# EAGLE board PROIECT_OPEN_READER v89 (EAGLE 9.7.0)
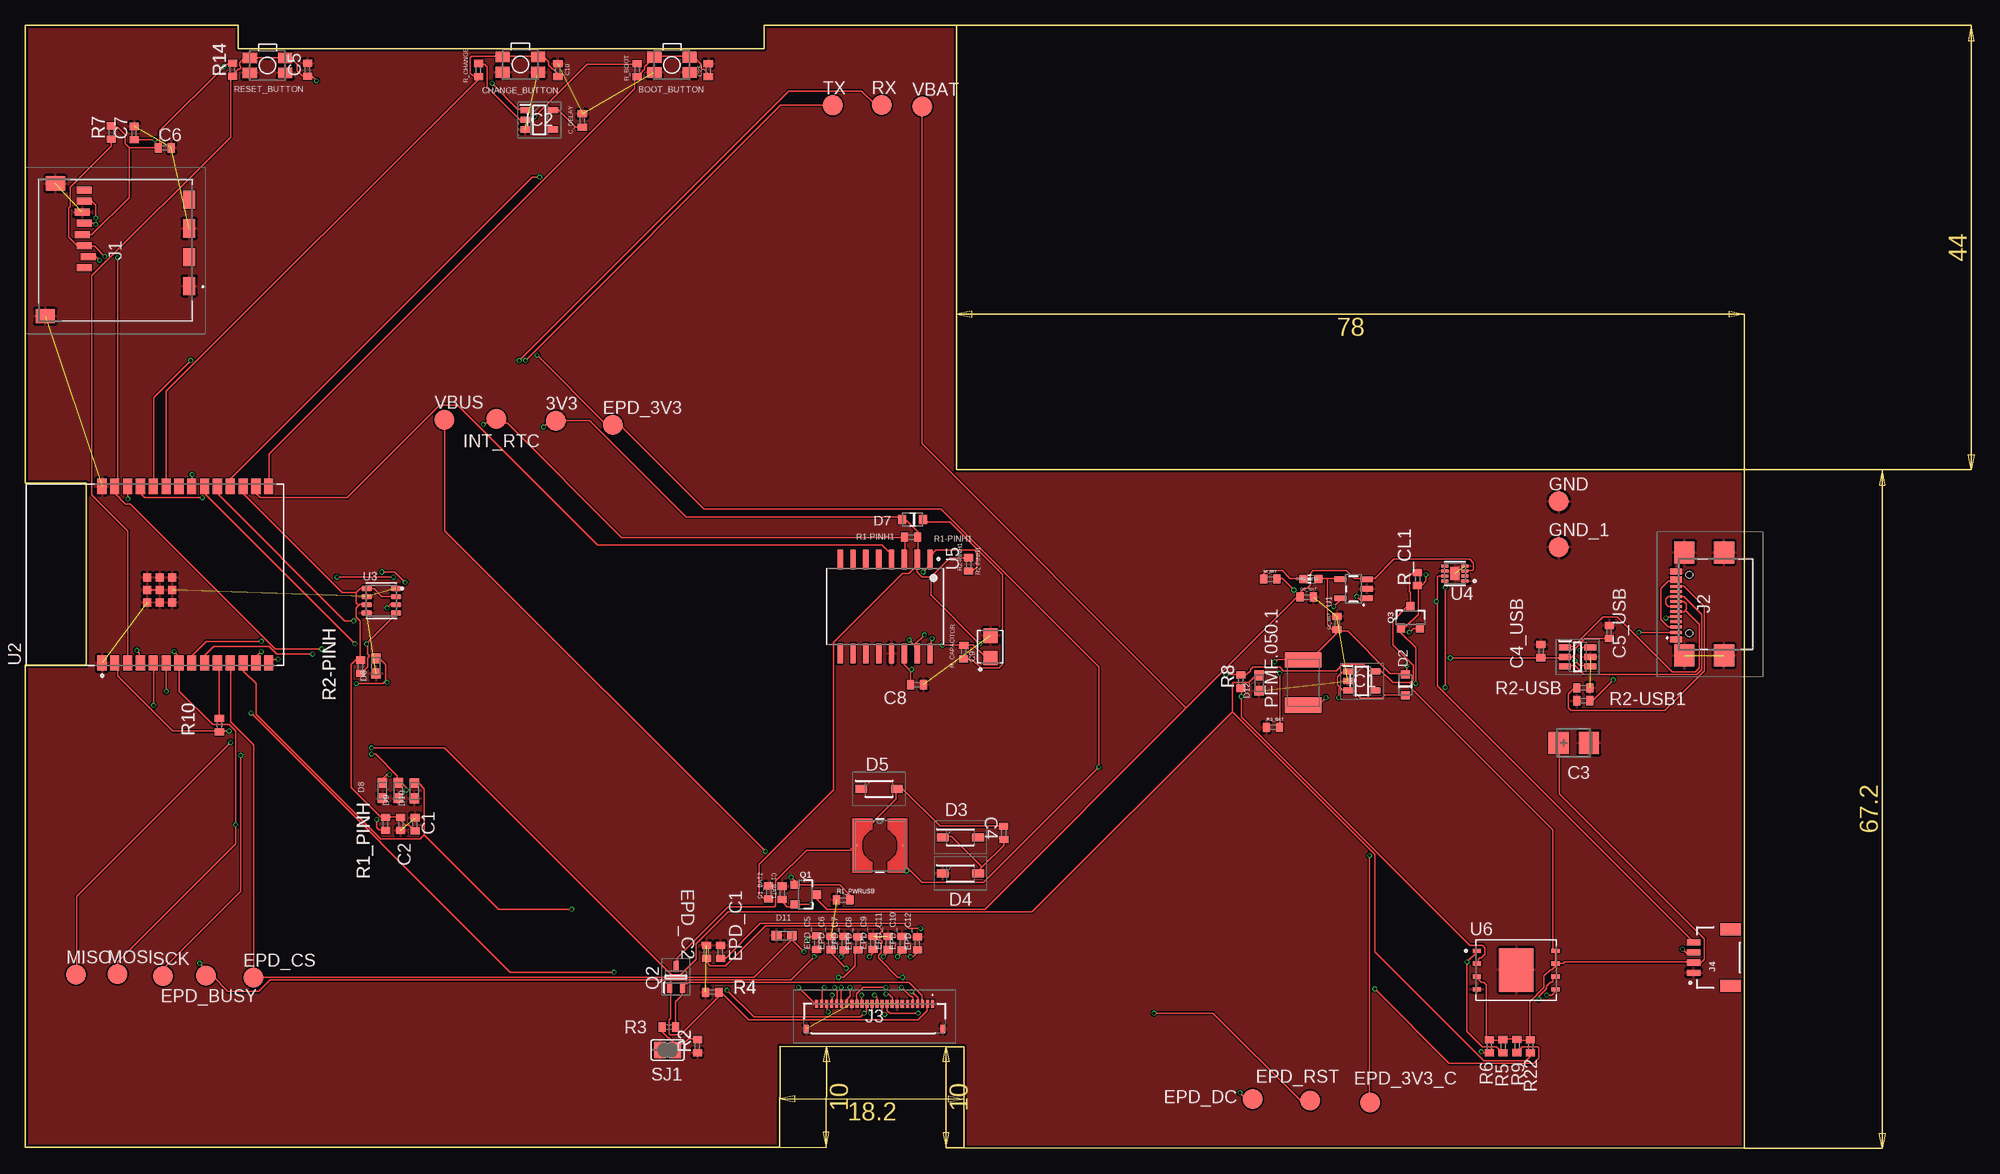
[diagram p0: board, top side]
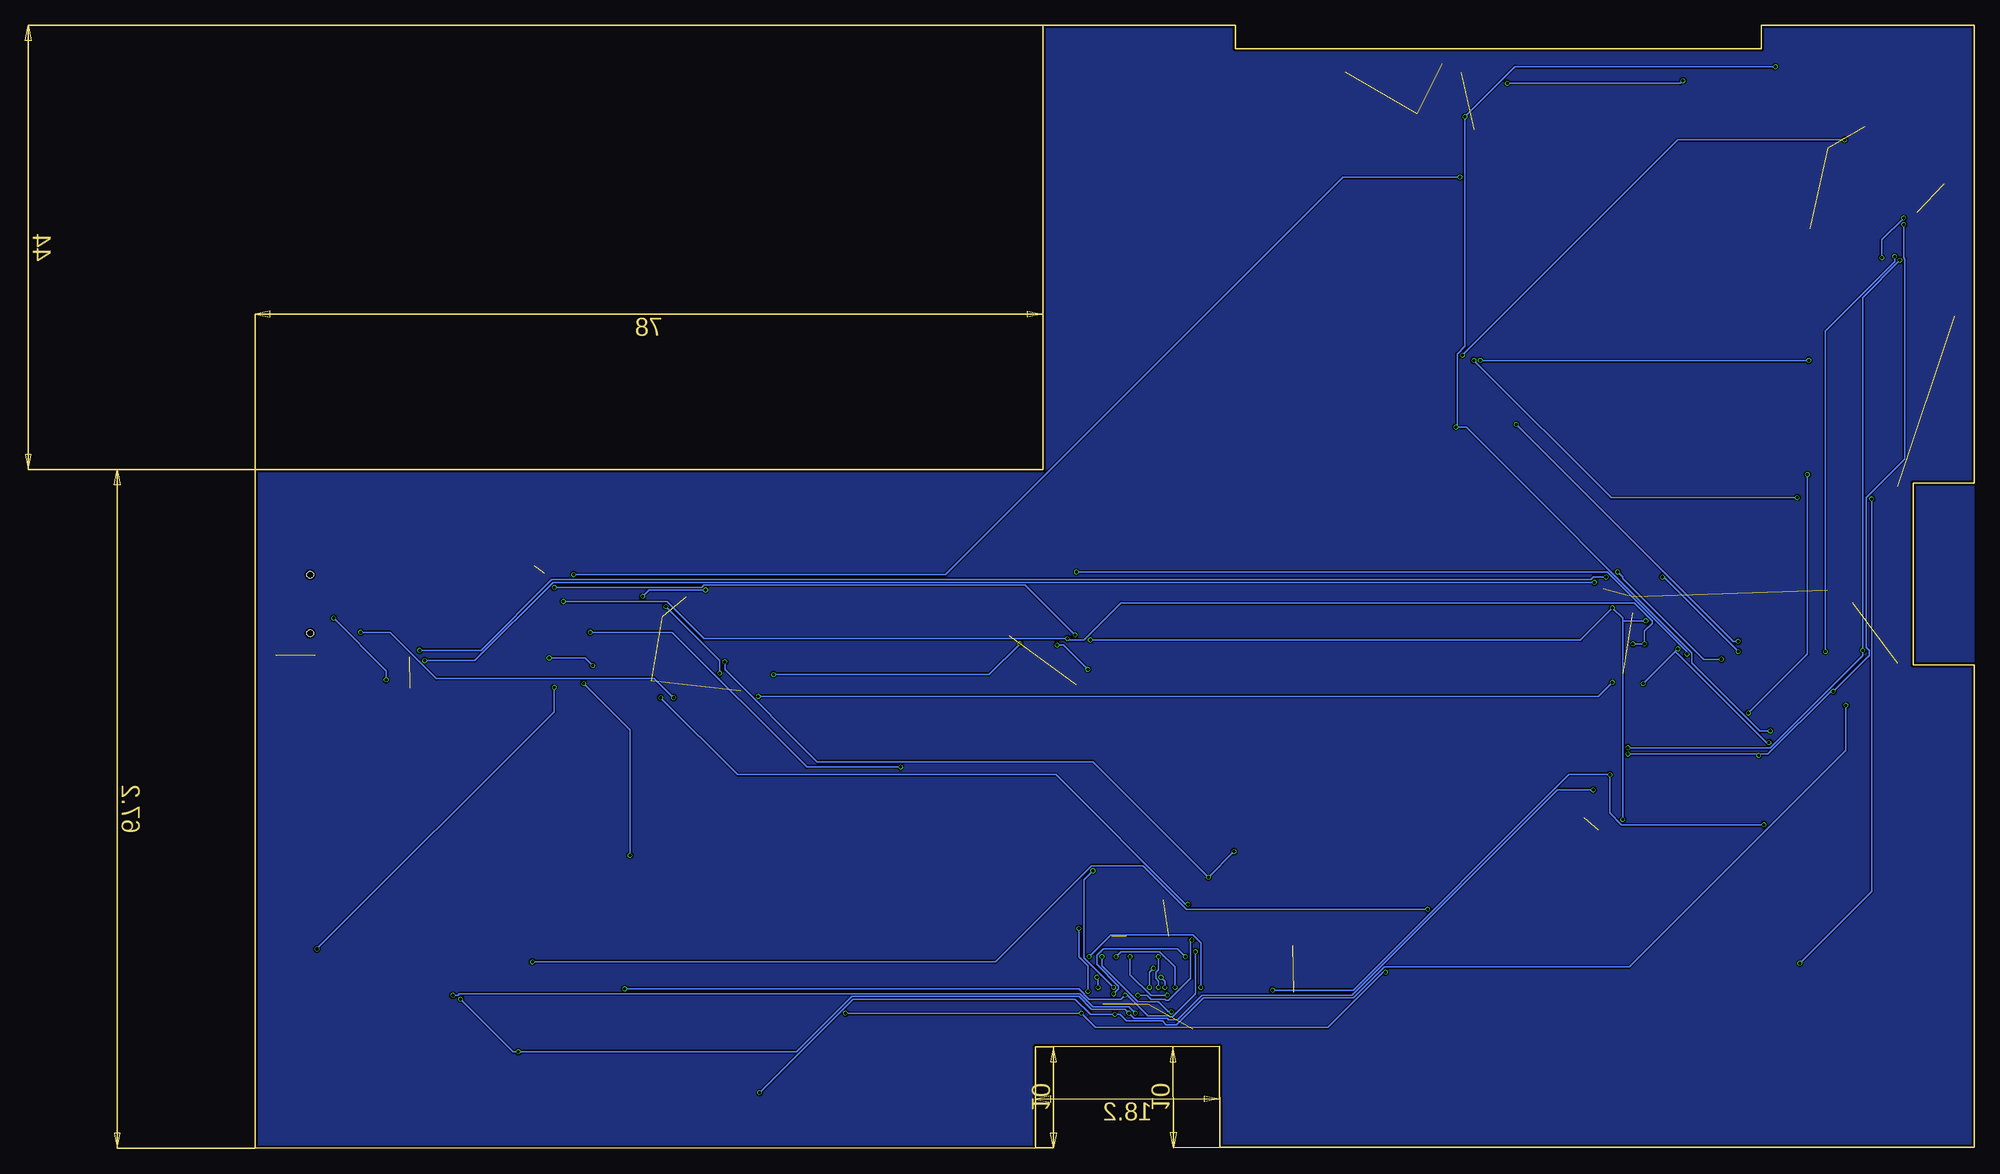
[diagram p1: board, bottom side, seen from below]

Size 170.22 x 111.22 mm. Coordinates in mm from the lower left corner, seen from the top.
Outline: 92.94,10.06 74.73,10.1 74.69,0.1 0.01,0.1 0.01,47.89 6.05,47.89 6.05,65.91 0,65.91 0,111.22 21.06,111.22 21.06,108.88 73.16,108.88 73.16,111.2 92.22,111.2 92.22,67.2 170.22,67.2 170.22,0 92.94,0.06 92.94,10.06
Copper layers (1*16): Top 0.035mm / dielectric 1.6mm / Bottom 0.035mm
Design rules "jlcpcb-2layers.dru": minimum track width 5mil, minimum drill 0.3mm, track to track 5mil, track to pad 5mil, pad to pad 5mil, via to via 5mil, smd to smd 5mil, copper to edge 0.2mm, drill to drill 6mil, minimum pad ring 10mil, minimum via ring 3mil, stop-mask expansion 4mil, vias tented up to drill 0mil, thermal gap 10mil

## Footprints (pad centres in the part's own frame; a part is rotated, then mirrored left to right if it is on the bottom)
TP20R = smd 2 x 2: TP 0,0
MYBUTTON = smd 1.4 x 1.05: 1 1.75,0.75; 2 -1.75,0.75; 3 -1.75,-0.75; 4 1.75,-0.75
EAGLE-LTSPICE_C0402 = smd 0.7 x 0.9: 1 -0.65,0; 2 0.65,0
RCL_CT3528 = smd 2 x 2.2: + -1.5,0; - 1.5,0
CAPCP3225X100N = smd 1.4 x 1.4: 1 -1.1,0; 2 1.1,0
ADAFRUIT_CHIP-LED0603 = smd 0.8 x 0.8: A 0,-0.75; C 0,0.75
SOT95P280X145-6N = smd 1.2 x 0.6: 1 -1.25,0.95; 2 -1.25,0; 3 -1.25,-0.95; 4 1.25,-0.95; 5 1.25,0; 6 1.25,0.95
ESP32_WROVER_AVX---SD0805S020S1R0_AVX_SD0805S020S1R0_0 = smd 0.8 x 0.9: 1 -1.05,0; 2 1.05,0
SOD3716X135N = smd 1.15 x 0.8: 1 -1.75,0; 2 1.75,0
DIOC1608X36N = smd 0.97 x 0.94: 1 -0.75,0; 2 0.75,0
SOT95P280X120-5N = smd 0.9 x 0.6: 1 -1.4,0.95; 2 -1.4,0; 3 -1.4,-0.95; 4 1.4,-0.95; 5 1.4,0.95
SOT95P280X125-5N = smd 0.9 x 0.6: 1 -1.4,0.95; 2 -1.4,0; 3 -1.4,-0.95; 4 1.4,-0.95; 5 1.4,0.95
112ATAARR03ATTEND = smd 1.8 x 1.2: G1 10.6,10.4; G2 4.9,10.4; S1 7.75,10.4; S2 2.05,10.4 | smd 1.4 x 1.9: G3 13.6,-3.85; G4 0.45,-2.85 | smd 0.7 x 1.5: P1 8.8,0; P2 7.7,0.4; P3 6.6,0; P4 5.5,-0.2; P5 4.4,0; P6 3.3,-0.2; P7 2.2,0; P8 1.1,0
SAMACSYS_PARTS_USB4110GFA = smd 0.3 x 1.15: A1 -3.66,3.898; A4 -2.79,3.908; A5 -1.24,3.898; A6 -0.24,3.898; A7 0.26,3.898; A8 1.26,3.898; A9 2.56,3.898; A12 3.36,3.898; B1 3.06,3.898; B4 2.26,3.898; B5 1.76,3.898; B6 0.76,3.898; B7 -0.74,3.898; B8 -1.74,3.898; B9 -2.26,3.898; B12 -3.35,3.898 | smd 2.18 x 2: MP1 -5.11,-0.827; MP2 5.11,-0.827; MP3 -5.11,3.103; MP4 5.11,3.103 | hole 0.65: -2.89,2.603; 2.89,2.603
FH34SRJ24S05SH99 = smd 0.3 x 0.8: 1 5.75,1.45; 2 5.25,1.45; 3 4.75,1.45; 4 4.25,1.45; 5 3.75,1.45; 6 3.25,1.45; 7 2.75,1.45; 8 2.25,1.45; 9 1.75,1.45; 10 1.25,1.45; 11 0.75,1.45; 12 0.25,1.45; 13 -0.25,1.45; 14 -0.75,1.45; 15 -1.25,1.45; 16 -1.75,1.45; 17 -2.25,1.45; 18 -2.75,1.45; 19 -3.25,1.45; 20 -3.75,1.45; 21 -4.25,1.45; 22 -4.75,1.45; 23 -5.25,1.45; 24 -5.75,1.45 | smd 0.4 x 0.8: MP1 6.75,-1.05; MP2 -6.75,-1.05
JST04_1MM_RA = smd 0.6 x 1.35: 1 -1.5,0; 2 -0.5,0; 3 0.5,0; 4 1.5,0 | smd 1.2 x 2: NC1 2.8,-3.675; NC2 -2.8,-3.675
IND_4828-WE-TPC_WRE = smd 0.127 x 0.127: 1 -2.286,0; 2 2.286,0
ESP32C6_VARISTOR_CT/CN1812 = smd 1.5 x 3.6: 1 -2.25,0; 2 2.25,0
ESP32_WROVER_SPARKFUN-DISCRETESEMI_SOT23-3 = smd 0.8 x 0.9: 1 -0.95,-1; 2 0.95,-1; 3 0,1.1
SOT65P210X110-3N = smd 1.05 x 0.5: 1 -1.05,0.65; 2 -1.05,-0.65; 3 1.05,0
ESP32_WROVER_EAGLE-LTSPICE_R0402 = smd 0.7 x 0.9: 1 -0.65,0; 2 0.65,0
SJ = smd 1.168 x 1.6: 1 -0.762,0; 2 0.762,0
ESP32_WROVER_SPARKFUN-IC-POWER_SOT23-5 = smd 0.55 x 1.2: 1 -0.95,-1.3; 2 0,-1.3; 3 0.95,-1.3; 4 0.95,1.3; 5 -0.95,1.3
XCVR_ESP32-C6-WROOM-1-N8 = smd 1.5 x 0.9: 1 -8.75,5.26; 2 -8.75,3.99; 3 -8.75,2.72; 4 -8.75,1.45; 5 -8.75,0.18; 6 -8.75,-1.09; 7 -8.75,-2.36; 8 -8.75,-3.63; 9 -8.75,-4.9; 10 -8.75,-6.17; 11 -8.75,-7.44; 12 -8.75,-8.71; 13 -8.75,-9.98; 14 -8.75,-11.25; 15 8.75,-11.25; 16 8.75,-9.98; 17 8.75,-8.71; 18 8.75,-7.44; 19 8.75,-6.17; 20 8.75,-4.9; 21 8.75,-3.63; 22 8.75,-2.36; 23 8.75,-1.09; 24 8.75,0.18; 25 8.75,1.45; 26 8.75,2.72; 27 8.75,3.99; 28 8.75,5.26 | smd 0.8 x 0.8: 29_1 -2.755,0.79; 29_2 -1.505,0.79; 29_3 -0.255,0.79; 29_4 -2.755,-0.46; 29_5 -1.505,-0.46; 29_6 -0.255,-0.46; 29_7 -2.755,-1.71; 29_8 -1.505,-1.71; 29_9 -0.255,-1.71
ESP32_WROVER_BME680_PSON80P300X300X100-8N = smd 1.016 x 0.5: 1 1.458,1.2; 2 1.458,0.4; 3 1.458,-0.4; 4 1.458,-1.2; 5 -1.458,-1.22; 6 -1.458,-0.4; 7 -1.458,0.4; 8 -1.458,1.2
SON50P200X200X80-9N = smd 0.76 x 0.27: 1 -0.985,0.75; 2 -0.985,0.25; 3 -0.985,-0.25; 4 -0.985,-0.75; 5 0.985,-0.75; 6 0.985,-0.25; 7 0.985,0.25; 8 0.985,0.75 | smd 0.9 x 1.3: 9 0,0
SOIC127P1032X265-16N = smd 2.05 x 0.59: 1 -4.655,4.445; 2 -4.655,3.175; 3 -4.655,1.905; 4 -4.655,0.635; 5 -4.655,-0.635; 6 -4.655,-1.905; 7 -4.655,-3.175; 8 -4.655,-4.445; 9 4.655,-4.445; 10 4.655,-3.175; 11 4.655,-1.905; 12 4.655,-0.635; 13 4.655,0.635; 14 4.655,1.905; 15 4.655,3.175; 16 4.655,4.445
SON127P600X800X80-9N = smd 0.94 x 0.44: 1 -3.895,1.905; 2 -3.895,0.635; 3 -3.895,-0.635; 4 -3.895,-1.905; 5 3.895,-1.905; 6 3.895,-0.635; 7 3.895,0.635; 8 3.895,1.905 | smd 3.4 x 4.3: 9 0,0

## Placement (x,y rotation side)
3V3  TPTP20R  [TP20R]  52.54,72.07 0 top
BOOT_BUTTON  BUTTON_CUSYOMV1  [MYBUTTON]  64.03,107.31 180 top
C1  [EAGLE-LTSPICE_C0402]  38.59,32.1 90 top
C1_BAT  4.7uF  [EAGLE-LTSPICE_C0402]  129.87,52.02 90 top
C1_BAT1  [EAGLE-LTSPICE_C0402]  74.94,25.32 90.1 top
C1_BAT2  [EAGLE-LTSPICE_C0402]  73.61,25.34 90 top
C2  [EAGLE-LTSPICE_C0402]  37.18,32.12 270 top
C2_BAT  4.7uF  [EAGLE-LTSPICE_C0402]  126.87,54.59 0 top
C3  [RCL_CT3528]  153.3,40.15 0 top
C4  4.7uF/25V  [EAGLE-LTSPICE_C0402]  96.87,31.25 90.7 top
C4_USB  100nF  [EAGLE-LTSPICE_C0402]  150.06,49.24 90 top
C5  1uF  [EAGLE-LTSPICE_C0402]  27.95,106.8 90 top
C5_USB  4.7uF  [EAGLE-LTSPICE_C0402]  156.82,51.15 90 top
C6  100nF  [EAGLE-LTSPICE_C0402]  13.82,99.07 0 top
C7  10uF  [EAGLE-LTSPICE_C0402]  10.77,100.55 90 top
C8  100nF  [EAGLE-LTSPICE_C0402]  88.3,45.92 0 top
C9  CPH3225A  [CAPCP3225X100N]  95.55,49.67 90 top
C10  100nF  [EAGLE-LTSPICE_C0402]  52.73,106.78 90 top
C25  100nF  [EAGLE-LTSPICE_C0402]  67.63,106.76 90 top
C_DELAY  100nF  [EAGLE-LTSPICE_C0402]  55.16,101.79 90 top
CHANGE_BUTTON  BUTTON_CUSYOMV1  [MYBUTTON]  49.01,107.32 180 top
CHG_LED  [ADAFRUIT_CHIP-LED0603]  127.3,56.37 90 top
D1  USBLC6-2SC6Y  [SOT95P280X145-6N]  153.69,48.67 0 top
D2  ESP32_WROVER_AVX---SD0805S020S1R0_AVX_SD0805S020S1R0_0_0AVX_SD0805S020S1R0_0_0  [ESP32_WROVER_AVX---SD0805S020S1R0_AVX_SD0805S020S1R0_0]  136.64,45.89 90 top
D3  MBR0530  [SOD3716X135N]  92.58,30.81 0 top
D4  MBR0530  [SOD3716X135N]  92.58,27.23 0 top
D5  MBR0530  [SOD3716X135N]  84.53,35.61 0 top
D6  PGB1010603MR  [DIOC1608X36N]  34.72,47.77 90 top
D7  ESP32_WROVER_AVX---SD0805S020S1R0_AVX_SD0805S020S1R0_0_0AVX_SD0805S020S1R0_0_0  [ESP32_WROVER_AVX---SD0805S020S1R0_AVX_SD0805S020S1R0_0]  87.84,62.26 180 top
D8  PGB1010603MR  [DIOC1608X36N]  35.38,35.43 90 top
D9  PGB1010603MR  [DIOC1608X36N]  36.94,35.43 90 top
D10  PGB1010603MR  [DIOC1608X36N]  38.51,35.41 90 top
D11  PGB1010603MR  [DIOC1608X36N]  75.14,21.08 0 top
D12  PGB1010603MR  [DIOC1608X36N]  122.16,46.07 90 top
EPD_3V3  TPTP20R  [TP20R]  58.17,71.65 0 top
EPD_3V3_C  TPTP20R  [TP20R]  133.14,4.54 0 top
EPD_BUSY  TPTP20R  [TP20R]  17.9,17.1 0 top
EPD_C1  1uF/50V  [EAGLE-LTSPICE_C0402]  68.82,19.47 90 top
EPD_C2  1uF/50V  [EAGLE-LTSPICE_C0402]  67.44,19.46 90.4 top
EPD_C5  0.1uF/50V  [EAGLE-LTSPICE_C0402]  78.36,20.38 90 top
EPD_C6  1uF/50V  [EAGLE-LTSPICE_C0402]  79.77,20.34 90 top
EPD_C7  1uF/50V  [EAGLE-LTSPICE_C0402]  81.09,20.33 90 top
EPD_C8  1uF/50V  [EAGLE-LTSPICE_C0402]  82.46,20.31 90 top
EPD_C9  1uF/50V  [EAGLE-LTSPICE_C0402]  83.93,20.36 90 top
EPD_C10  1uF/50V  [EAGLE-LTSPICE_C0402]  86.82,20.33 90 top
EPD_C11  1uF/50V  [EAGLE-LTSPICE_C0402]  85.43,20.34 90 top
EPD_C12  1uF/50V  [EAGLE-LTSPICE_C0402]  88.32,20.3 90 top
EPD_CS  TPTP20R  [TP20R]  22.58,16.92 0 top
EPD_DC  TPTP20R  [TP20R]  121.51,4.9 0 top
EPD_RST  TPTP20R  [TP20R]  127.22,4.72 0 top
GND  TPTP20R  [TP20R]  151.82,64.07 0 top
GND_1  TPTP20R  [TP20R]  151.82,59.55 0 top
IC1  XC6220A331MR-G  [SOT95P280X120-5N]  132.34,46.28 0 top
IC2  BD5229G-TR  [SOT95P280X125-5N]  50.89,101.85 0 top
INT_RTC  TPTP20R  [TP20R]  46.66,72.25 0 top
J1  112A-TAAR-R03_ATTEND  [112ATAARR03ATTEND]  5.83,96 270 top
J2  SAMACSYS_PARTS_USB4110-GF-A  [SAMACSYS_PARTS_USB4110GFA]  167.35,53.9 90 top
J3  FH34SRJ-24S-0.5SH_99_  [FH34SRJ24S05SH99]  84.08,12.87 0 top
J4  QWIIC_RIGHT_ANGLE  [JST04_1MM_RA]  165.17,18.9 90 top
L1  68uH  [IND_4828-WE-TPC_WRE]  84.61,29.98 0 top
MISO  TPTP20R  [TP20R]  5.04,17.23 0 top
MOSI  TPTP20R  [TP20R]  9.12,17.25 0 top
PFMF.050.1  [ESP32C6_VARISTOR_CT/CN1812]  126.52,46.13 90 top
Q1  20V/4.2A/52mΩ/1.4W  [ESP32_WROVER_SPARKFUN-DISCRETESEMI_SOT23-3]  77.23,25.13 270 top
Q2  SI1308EDL-T1-GE3  [SOT65P210X110-3N]  64.42,16.98 90 top
Q3  20V/4.2A/52mΩ/1.4W  [ESP32_WROVER_SPARKFUN-DISCRETESEMI_SOT23-3]  137.14,52.55 0 top
R1-PINH1  10K  [ESP32_WROVER_EAGLE-LTSPICE_R0402]  87.71,60.54 0 top
R1_BAT  200  [ESP32_WROVER_EAGLE-LTSPICE_R0402]  123.26,56.38 0 top
R1_PINH  10K  [ESP32_WROVER_EAGLE-LTSPICE_R0402]  35.67,32.13 90 top
R1_PWRUSB  100K  [ESP32_WROVER_EAGLE-LTSPICE_R0402]  80.98,24.61 0 top
R2  2.2  [ESP32_WROVER_EAGLE-LTSPICE_R0402]  66.55,10.13 90 top
R2-PINH  10K  [ESP32_WROVER_EAGLE-LTSPICE_R0402]  33.19,47.69 90 top
R2-PINH1  10K  [ESP32_WROVER_EAGLE-LTSPICE_R0402]  93.39,57.84 90 top
R2-USB  5K1  [ESP32_WROVER_EAGLE-LTSPICE_R0402]  154.27,45.6 0 top
R2-USB1  5k1  [ESP32_WROVER_EAGLE-LTSPICE_R0402]  154.25,44.33 0 top
R2_BAT  2K  [ESP32_WROVER_EAGLE-LTSPICE_R0402]  123.52,41.7 0 top
R3  0.47  [ESP32_WROVER_EAGLE-LTSPICE_R0402]  63.72,12.02 0 top
R4  10K  [ESP32_WROVER_EAGLE-LTSPICE_R0402]  68.02,15.46 0 top
R5  [ESP32_WROVER_EAGLE-LTSPICE_R0402]  146.31,10.13 90 top
R6  [ESP32_WROVER_EAGLE-LTSPICE_R0402]  144.95,10.12 90 top
R7  [ESP32_WROVER_EAGLE-LTSPICE_R0402]  8.53,100.6 90 top
R8  [ESP32_WROVER_EAGLE-LTSPICE_R0402]  120.35,46.22 90 top
R9  [ESP32_WROVER_EAGLE-LTSPICE_R0402]  147.68,10.14 90 top
R10  R1  [ESP32_WROVER_EAGLE-LTSPICE_R0402]  19.23,41.91 90 top
R14  [ESP32_WROVER_EAGLE-LTSPICE_R0402]  20.52,106.81 90 top
R22  [ESP32_WROVER_EAGLE-LTSPICE_R0402]  149.03,10.12 90 top
R_BOOT  10K  [ESP32_WROVER_EAGLE-LTSPICE_R0402]  60.58,106.77 90 top
R_CAPACITOR  15  [ESP32_WROVER_EAGLE-LTSPICE_R0402]  92.91,49.13 89.3 top
R_CHANGE  10K  [ESP32_WROVER_EAGLE-LTSPICE_R0402]  44.87,106.78 90 top
R_CL1  10K  [ESP32_WROVER_EAGLE-LTSPICE_R0402]  137.84,56.39 90 top
RESET_BUTTON  BUTTON_CUSYOMV1  [MYBUTTON]  23.99,107.24 180 top
RX  TPTP20R  [TP20R]  84.79,103.33 0 top
SCK  TPTP20R  [TP20R]  13.61,17.08 0 top
SJ1  [SJ]  63.6,9.74 0 top
TX  TPTP20R  [TP20R]  79.96,103.3 0 top
U1  [ESP32_WROVER_SPARKFUN-IC-POWER_SOT23-5]  131.51,55.41 90 top
U2  ESP32-C6-WROOM-1-N8  [XCVR_ESP32-C6-WROOM-1-N8]  12.86,56.81 90 top
U3  ESP32_WROVER_BME680_BME680  [ESP32_WROVER_BME680_PSON80P300X300X100-8N]  35.26,54.23 0 top
U4  MAX17048G+T10  [SON50P200X200X80-9N]  141.55,56.93 180 top
U5  DS3231SN#  [SOIC127P1032X265-16N]  85.13,53.67 270 top
U6  W25Q512JVEIQ  [SON127P600X800X80-9N]  147.61,17.66 0 top
VBAT  TPTP20R  [TP20R]  88.82,103.16 0 top
VBUS  TPTP20R  [TP20R]  41.52,72.17 0 top

## Library data of the parts
3V3 BOOT_BUTTON CHANGE_BUTTON CHG_LED EPD_3V3 EPD_3V3_C EPD_BUSY EPD_CS EPD_DC EPD_RST GND GND_1 INT_RTC MISO MOSI PFMF.050.1 RESET_BUTTON RX SCK SJ1 TX VBAT VBUS = DeskAssistant v19 v1
C1 C1_BAT C1_BAT1 C1_BAT2 C2 C2_BAT C4 C4_USB C5 C5_USB C6-C8 C10 C25 C_DELAY EPD_C1 EPD_C2 EPD_C5-EPD_C12 = DeskAssistant v19 v1; SPICEMODEL: NONE; SPICEPREFIX: C
C3 = DeskAssistant v19 v1; SPICEPREFIX: C
C9 = DeskAssistant v19 v1; AVAILABILITY: Not in stock; CHECK_PRICES: https://www.snapeda.com/parts/CPH3225A/Seiko+Instruments/view-part/?ref=eda; DESCRIPTION: 11 mF (EDLC) Supercapacitor 3.3 V 1210 (3225 Metric) - -; MF: Seiko Instruments; MP: CPH3225A; PACKAGE: 1210 Seiko; PRICE: None; PURCHASE-URL: https://www.snapeda.com/api/url_track_click_mouser/?unipart_id=562593&manufacturer=Seiko Instruments&part_name=CPH3225A&search_term=None; SNAPEDA_LINK: https://www.snapeda.com/parts/CPH3225A/Seiko+Instruments/view-part/?ref=snap
D1 = DeskAssistant v19 v1; AVAILABILITY: In Stock; CHECK_PRICES: https://www.snapeda.com/parts/USBLC6-2SC6Y/STMicroelectronics/view-part/?ref=eda; DESCRIPTION: 17V Clamp 5A (8/20µs) Ipp Tvs Diode Surface Mount SOT-23-6; MF: STMicroelectronics; MP: USBLC6-2SC6Y; PACKAGE: SOT-23-6 STMicroelectronics; PRICE: None; SNAPEDA_LINK: https://www.snapeda.com/parts/USBLC6-2SC6Y/STMicroelectronics/view-part/?ref=snap
D2 D7 = DeskAssistant v19 v1; CENTROID_NOT_SPECIFIED: No; DATASHEET: http://datasheets.avx.com/schottky.pdf; DIGIKEY_DESCRIPTION: DIODE SCHOTTKY 20V 1A 0805; DIGIKEY_PART_NUMBER: 478-7800-1-ND; LEAD_FREE: yes; MF: AVX; MOUSER_PART_NUMBER: 581-SD0805S020S1R0; PACKAGE: 0805 (2012 metric); PREFIX: D; ROHS: yes; TEMPERATURE_RANGE_HIGH: +125°C; TEMPERATURE_RANGE_LOW: -55°C
D3-D5 = DeskAssistant v19 v1; AVAILABILITY: In Stock; CHECK_PRICES: https://www.snapeda.com/parts/MBR0530/Onsemi/view-part/?ref=eda; DESCRIPTION: Diode Schottky 30 V 500mA Surface Mount SOD-123; MF: ON Semiconductor; MP: MBR0530; PACKAGE: SOD-123-2 ON Semiconductor; PRICE: None; PURCHASE-URL: https://www.snapeda.com/api/url_track_click_mouser/?unipart_id=179458&manufacturer=ON Semiconductor&part_name=MBR0530&search_term=None; SNAPEDA_LINK: https://www.snapeda.com/parts/MBR0530/Onsemi/view-part/?ref=snap
D6 D8-D12 = DeskAssistant v19 v1; AVAILABILITY: In Stock; CHECK_PRICES: https://www.snapeda.com/parts/PGB1010603MR/Littelfuse/view-part/?ref=eda; DESCRIPTION: 150V (Typ) Clamp - Ipp Tvs Diode Surface Mount 0603 (1608 Metric); MF: Littelfuse Inc.; MP: PGB1010603MR; PACKAGE: 0603 Littelfuse Inc.; PRICE: None; PURCHASE-URL: https://www.snapeda.com/api/url_track_click_mouser/?unipart_id=5659453&manufacturer=Littelfuse Inc.&part_name=PGB1010603MR&search_term=None; SNAPEDA_LINK: https://www.snapeda.com/parts/PGB1010603MR/Littelfuse/view-part/?ref=snap
IC1 = DeskAssistant v19 v1; DESCRIPTION: LDO Voltage Regulators; HEIGHT: 1.2mm; MANUFACTURER_NAME: Torex; MANUFACTURER_PART_NUMBER: XC6220A331MR-G; MOUSER_PART_NUMBER: 865-XC6220A331MR-G; MOUSER_PRICE-STOCK: https://www.mouser.co.uk/ProductDetail/Torex-Semiconductor/XC6220A331MR-G?qs=AsjdqWjXhJ8ZSWznL1J0gg%3D%3D
IC2 = DeskAssistant v19 v1; DESCRIPTION: Voltage Detector with Adjustable Delay Time: CMOS processes are utilized to develop high precision, low current consumption CMOS reset ICs that allow arbitrary setting of the delay time. The extensive lineup includes both Nch Open Drain and CMOS output types in a wide range of detection voltages (from 2.3V to 6.0V, in 0.1V steps), enabling selection of the ideal solution based on customer requirements. In addition, the entire series is of course both lead-free and RoHS-compliant.; HEIGHT: 1.25mm; MANUFACTURER_NAME: ROHM Semiconductor; MANUFACTURER_PART_NUMBER: BD5229G-TR; MOUSER_PART_NUMBER: 755-BD5229G-TR; MOUSER_PRICE-STOCK: https://www.mouser.co.uk/ProductDetail/ROHM-Semiconductor/BD5229G-TR?qs=4kLU8WoGk0vvnhrrYwdszw%3D%3D
J1 = DeskAssistant v19 v1; DESCRIPTION: Micro SD Card Socket, Push-Push Type, Top Mount, SMT, H=1.83mm, 10u; HEIGHT: 1.9mm; MANUFACTURER_NAME: ATTEND; MANUFACTURER_PART_NUMBER: 112A-TAAR-R03 ATTEND
J2 = DeskAssistant v19 v1; DESCRIPTION: CONN USB 2.0 TYPE-C R/A SMT; HEIGHT: 3.26mm; MANUFACTURER_NAME: GCT (GLOBAL CONNECTOR TECHNOLOGY); MANUFACTURER_PART_NUMBER: USB4110-GF-A; MOUSER_PART_NUMBER: 640-USB4110-GF-A; MOUSER_PRICE-STOCK: https://www.mouser.co.uk/ProductDetail/GCT/USB4110-GF-A?qs=KUoIvG%2F9IlYiZvIXQjyJeA%3D%3D
J3 = DeskAssistant v19 v1; DESCRIPTION: 24 Position FFC, FPC Connector Contacts, Top and Bottom 0.020" (0.50mm) Surface Mount, Right Angle; HEIGHT: 1.1mm; MANUFACTURER_NAME: Hirose; MANUFACTURER_PART_NUMBER: FH34SRJ-24S-0.5SH(99); MOUSER_PART_NUMBER: 798-FH34SRJ24S05SH99; MOUSER_PRICE-STOCK: https://www.mouser.co.uk/ProductDetail/Hirose-Connector/FH34SRJ-24S-0.5SH99?qs=vcbW%252B4%252BSTIpKBl5ap9J8Fw%3D%3D
J4 = DeskAssistant v19 v1; PROD_ID: CONN-13694
L1 = DeskAssistant v19 v1; COPYRIGHT: Copyright (C) 2024 Ultra Librarian. All rights reserved.; MANUFACTURER_PART_NUMBER: 744043680; MFR_NAME: Wurth Electronics
Q1 Q3 = DeskAssistant v19 v1; PROD_ID: TRAN-14388
Q2 = DeskAssistant v19 v1; AVAILABILITY: In Stock; CHECK_PRICES: https://www.snapeda.com/parts/SI1308EDL-T1-GE3/Vishay+Siliconix/view-part/?ref=eda; DESCRIPTION: Si1308EDL-T1-GE3 N-channel MOSFET Transistor, 1.5 A, 30 V, 3-Pin SC-70 | Siliconix / Vishay SI1308EDL-T1-GE3; MF: Vishay Siliconix; MP: SI1308EDL-T1-GE3; PACKAGE: SOT-323 Vishay Semiconductor; PRICE: None; PURCHASE-URL: https://www.snapeda.com/api/url_track_click_mouser/?unipart_id=274603&manufacturer=Vishay Siliconix&part_name=SI1308EDL-T1-GE3&search_term=None; SNAPEDA_LINK: https://www.snapeda.com/parts/SI1308EDL-T1-GE3/Vishay+Siliconix/view-part/?ref=snap
R1-PINH1 R1_BAT R1_PINH R1_PWRUSB R2 R2-PINH R2-PINH1 R2-USB R2-USB1 R2_BAT R3-R10 R14 R22 R_BOOT R_CAPACITOR R_CHANGE R_CL1 = DeskAssistant v19 v1; SPICEMODEL: NONE; SPICEPREFIX: R
U1 = DeskAssistant v19 v1; PROD_ID: IC-09995
U2 = DeskAssistant v19 v1; AVAILABILITY: In Stock; CHECK_PRICES: https://www.snapeda.com/parts/ESP32-C6-WROOM-1-N8/Espressif+Systems/view-part/?ref=eda; DESCRIPTION: Multiprotocol Modules ESP32-C6 module, Wi-Fi 6 in 2.4 GHz band, Bluetooth 5, Zigbee 3.0 and Thread. ESP34-WROOM Compatible - ENGINEERING SAMPLE; MF: Espressif Systems; MP: ESP32-C6-WROOM-1-N8; PACKAGE: None; PRICE: None; SNAPEDA_LINK: https://www.snapeda.com/parts/ESP32-C6-WROOM-1-N8/Espressif+Systems/view-part/?ref=snap
U3 = DeskAssistant v19 v1; AVAILABILITY: Unavailable; DESCRIPTION: Integrated Environmental Unit; MF: Bosch Sensortec; MP: BME680; PACKAGE: LGA-8 Bosch Tools; PRICE: None
U4 = DeskAssistant v19 v1; AVAILABILITY: In Stock; CHECK_PRICES: https://www.snapeda.com/parts/MAX17048G+T10/Analog+Devices/view-part/?ref=eda; DESCRIPTION: 3µA 1-Cell/2-Cell Fuel Gauge with ModelGauge; MF: Analog Devices; MP: MAX17048G+T10; PACKAGE: TDFN-8 Maxim; PRICE: None; PURCHASE-URL: https://www.snapeda.com/api/url_track_click_mouser/?unipart_id=329239&manufacturer=Analog Devices&part_name=MAX17048G+T10&search_term=None; SNAPEDA_LINK: https://www.snapeda.com/parts/MAX17048G+T10/Analog+Devices/view-part/?ref=snap
U5 = DeskAssistant v19 v1; AVAILABILITY: In Stock; CHECK_PRICES: https://www.snapeda.com/parts/DS3231SN%23/Analog+Devices/view-part/?ref=eda; DESCRIPTION: Extremely Accurate I²C-Integrated RTC/TCXO/Crystal; MF: Analog Devices; MP: DS3231SN#; PACKAGE: SOIC-16 Maxim; PRICE: None; PURCHASE-URL: https://www.snapeda.com/api/url_track_click_mouser/?unipart_id=99048&manufacturer=Analog Devices&part_name=DS3231SN#&search_term=None; SNAPEDA_LINK: https://www.snapeda.com/parts/DS3231SN%23/Analog+Devices/view-part/?ref=snap
U6 = DeskAssistant v19 v1; AVAILABILITY: In Stock; CHECK_PRICES: https://www.snapeda.com/parts/W25Q512JVEIQ/Winbond+Electronics/view-part/?ref=eda; DESCRIPTION: FLASH - NOR Memory IC 512Mb (64M x 8) SPI - Quad I/O 133 MHz 8-WSON (8x6); MF: Winbond Electronics; MP: W25Q512JVEIQ; PACKAGE: Package; PRICE: None; SNAPEDA_LINK: https://www.snapeda.com/parts/W25Q512JVEIQ/Winbond+Electronics/view-part/?ref=snap

## Nets
3V3: 3V3.TP C1_BAT2.1 C3.+ C6.1 D7.2 IC1.5 IC2.2 J1.P4 J4.2 Q3.3 R1-PINH1.2 R2-PINH1.2 R5.2 R6.2 R7.2 R8.2 R9.2 R10.1 R14.2 R22.2 R_BOOT.2 R_CHANGE.2 R_CL1.2 U2.2 U5.2 U6.3 U6.7 U6.8
32KHZ: R2-PINH1.1 U2.9 U5.1
DN: D1.1 J2.A7 J2.B7
DP: D1.3 J2.A6 J2.B6
EPD_3V3: C7.1 EPD_3V3.TP J3.16 L1.2 Q3.2
EPD_3V3_C: EPD_3V3_C.TP Q3.1 R_CL1.1 U2.18
EPD_BUSY: EPD_BUSY.TP J3.9 U2.26
EPD_CS: D11.2 EPD_CS.TP J3.12 R9.1 U2.11
EPD_DC: EPD_DC.TP J3.11 U2.5
EPD_RST: EPD_RST.TP J3.10 U2.21
FLASH_CS: D10.2 R5.1 U2.12 U6.1
GDR: J3.2 Q2.1 R4.2
GND: BOOT_BUTTON.1 BOOT_BUTTON.2 C1.2 C1_BAT1.2 C1_BAT2.2 C1_BAT.2 C2.2 C2_BAT.2 C3.- C4_USB.2 C5.2 C5_USB.2 C6.2 C7.2 C8.2 C9.2 C10.2 C25.2 C_DELAY.2 CHANGE_BUTTON.1 CHANGE_BUTTON.2 D1.5 D4.1 D6.1 D8.1 D9.1 D10.1 D11.1 D12.1 EPD_C1.2 EPD_C2.2 EPD_C5.1 EPD_C6.2 EPD_C7.2 EPD_C8.2 EPD_C9.2 EPD_C10.2 EPD_C11.2 EPD_C12.2 GND.TP GND_1.TP IC1.2 IC2.3 J1.G1 J1.G2 J1.G3 J1.G4 J1.P6 J2.A1 J2.A12 J2.B1 J2.B12 J2.MP1 J2.MP2 J2.MP3 J2.MP4 J3.8 J3.17 J3.MP1 J3.MP2 J4.1 R1_PWRUSB.1 R2-USB1.1 R2-USB.2 R2.1 R2_BAT.1 R4.1 RESET_BUTTON.1 RESET_BUTTON.2 SJ1.1 U1.2 U2.1 U2.28 U2.29_1 U2.29_2 U2.29_3 U2.29_4 U2.29_5 U2.29_6 U2.29_7 U2.29_8 U2.29_9 U3.1 U3.5 U3.7 U4.1 U4.4 U4.6 U4.9 U5.13 U6.4 U6.9
GPIO8: R10.2 U2.10
I2C_PW: C1.1 C2.1 R1_PINH.2 R2-PINH.2 U2.17 U3.2 U3.6 U3.8
INT_RTC: INT_RTC.TP R1-PINH1.1 U2.8 U5.3
IO/BOOT: BOOT_BUTTON.3 BOOT_BUTTON.4 C25.1 R_BOOT.1 U2.15
IO/CHANGE: C10.1 CHANGE_BUTTON.3 CHANGE_BUTTON.4 R_CHANGE.1 U2.23
MISO: D6.2 J1.P7 MISO.TP R8.1 U2.27 U6.2
MOSI: D8.2 J1.P3 J3.14 MOSI.TP R7.1 U2.7 U6.5
N$1: J2.A4 PFMF.050.1.1
N$2: J2.A5 R2-USB1.2
N$3: J2.B5 R2-USB.1
N$4: C1_BAT1.1 D2.1 IC1.1 IC1.3 Q1.2
N$5: EPD_C12.1 J3.24
N$6: EPD_C11.1 J3.23
N$7: C4.1 D3.1 D4.2
N$8: R2_BAT.2 U1.5
N$9: EPD_C10.1 J3.22
N$10: EPD_C9.1 J3.21
N$11: CHG_LED.C R1_BAT.1
N$12: R1_BAT.2 U1.1
N$13: EPD_C8.1 J3.20
N$14: EPD_C7.1 J3.19
N$15: EPD_C6.1 J3.18
N$16: C_DELAY.1 IC2.5
N$17: EPD_C5.2 J3.15
N$18: EPD_C2.1 J3.5
N$19: EPD_C1.1 J3.4
N$21: D7.1 R_CAPACITOR.1
PREVGH: D5.1
PREVGL: D3.2
RESE: J3.3 Q2.2 R3.2
RESE': R2.2 R3.1 SJ1.2
RESET: C5.1 IC2.1 R14.1 RESET_BUTTON.3 RESET_BUTTON.4 U2.3
RTC_RST: U2.16 U5.4
RX: RX.TP U2.24
SCK: D9.2 J1.P5 J3.13 R6.1 SCK.TP U2.6 U6.6
SCL: J4.4 R2-PINH.1 U2.20 U3.4 U4.7 U5.16
SDA: J4.3 R1_PINH.1 U2.19 U3.3 U4.8 U5.15
SRC: C4.2 D5.2 L1.1 Q2.3
SS_SD: D12.2 J1.P2 R22.1 U2.4
TX: TX.TP U2.25
USB_D+: D1.4 U2.14
USB_D-: D1.6 U2.13
VBAT: C2_BAT.1 Q1.3 U1.3 U4.2 U4.3 VBAT.TP
VBUS: C1_BAT.1 C4_USB.1 C5_USB.1 CHG_LED.A D1.2 D2.2 PFMF.050.1.2 Q1.1 R1_PWRUSB.2 U1.4 VBUS.TP
VRTC: C8.1 C9.1 R_CAPACITOR.2 U5.14
VUSB: J2.A9 J2.B4 J2.B9

## Tracks (layer width: path | path; a pad name or v marks a point on that pad's centre or on a via)
3V3  (via drill 0.3)
  Top 0.127: R_CL1.2 137.8,57.08 137.41,57.08 137.03,56.7 137.03,55.17 137.16,55.04 137.16,53.77 Q3.3 137.03,53.65 136.78,53.65 135.38,52.25 135.38,49.84 137.41,47.8 137.41,46.41 137.16,46.15 | 137.16,46.15 135.38,46.15 134.24,47.3 133.86,47.3 IC1.5 133.73,47.3 133.1,47.3 132.46,47.93 130.43,47.93 129.79,47.3 124.59,47.3 124.21,47.68 121.54,47.68 121.28,47.42 121.28,47.3 120.9,46.92 120.4,46.92 R8.2 120.27,46.92 v118.87,46.92 | U6.3 143.76,16.94 143.76,16.82 144.15,16.44 144.4,16.44 144.65,16.18 144.65,11.1 144.91,10.85 R6.2 145.03,10.72 146.3,10.72 R5.2 146.43,10.85 147.57,10.85 R9.2 147.7,10.72 148.97,10.72 R22.2 148.97,10.85 148.97,14.53 150.37,15.93 150.37,17.07 151,17.71 151.13,17.71 151.76,18.34 | 151.51,18.34 151.51,19.48 U6.8 151.38,19.48 151.26,19.61 151.26,31.55 137.16,45.65 137.16,46.15 | 151.51,18.34 151.76,18.34 | 151.76,18.34 152.27,18.34 152.4,18.47 165.1,18.47 J4.2 165.23,18.34 165.86,18.34 166.24,18.72 166.24,20.75 151.89,35.11 151.89,40.06 C3.+ | 151.51,18.34 U6.7 151.76,18.34 | 10.29,99.11 9.91,99.49 9.91,100.38 9.14,101.14 8.64,101.14 R7.2 | 10.29,99.11 13.08,99.11 C6.1 13.21,99.11 13.34,99.24 13.34,100.76 v19.69,107.11 19.94,107.37 20.45,107.37 R14.2 | 10.29,99.11 10.29,94.16 6.6,90.48 5.71,90.48 J1.P4 | R_CHANGE.2 44.96,107.37 45.47,107.37 45.72,107.11 45.72,105.08 49.02,101.78 49.4,101.78 IC2.2 49.53,101.91 50.17,101.91 v50.42,102.16 55.63,107.37 60.58,107.37 R_BOOT.2 | U2.2 8.89,47.93 9.14,47.68 9.14,46.79 14.61,41.33 19.18,41.33 R10.1 19.3,41.33 v20.19,41.33 | 88.27,57.71 87.5,56.95 86.87,56.95 80.01,50.09 80.01,35.49 72.64,28.12 72.64,25.2 73.15,24.69 73.53,24.69 C1_BAT2.1
  Top 0.127: 88.27,57.71 88.27,58.22 U5.2 | U5.2 88.39,58.35 88.39,60.51 R1-PINH1.2 88.39,60.63 88.39,61.01 87.25,62.16 86.87,62.16 D7.2 86.74,62.28 86.49,62.54 65.41,62.54 55.88,72.06 52.58,72.06 3V3.TP 52.45,72.06 51.94,72.06 v51.31,71.43 | 89.66,56.57 91.57,58.47 93.34,58.47 R2-PINH1.2 | 89.66,56.57 88.77,56.57 88.27,57.08 88.27,57.71 | 88.27,57.71 U5.2 | v94.49,49.96 89.66,54.79 89.66,56.57
  Bottom 0.127: v20.19,41.33 21.21,41.33 27.94,48.06 27.94,49.08 50.29,71.43 51.18,71.43 | 51.18,71.43 51.18,78.67 50.42,79.43 v50.42,102.16 45.47,107.11 v19.69,107.11 | 51.18,71.43 v51.31,71.43 | v118.87,46.92 97.54,46.92 v94.49,49.96
32KHZ  (via drill 0.3)
  Top 0.127: R2-PINH1.1 93.47,57.2 93.85,57.2 94.23,57.58 94.23,58.98 93.98,59.24 90.17,59.24 89.66,58.73 89.66,58.35 U5.1 89.53,58.22 89.53,57.71 v88.9,57.08 | v28.45,48.95 24.89,48.95 24.13,49.71 18.67,49.71 17.78,48.82 17.78,48.06 U2.9
  Bottom 0.127: v28.45,48.95 28.45,49.2 36.32,57.08 v88.9,57.08
DN
  Top 0.127: 164.34,53.27 164.47,53.39 164.47,53.9 164.21,54.16 163.58,54.16 J2.A7 | 164.34,53.27 164.21,53.14 163.58,53.14 J2.B7 | 164.34,53.27 165.73,51.87 165.73,47.55 165.35,47.17 163.07,47.17 157.61,52.63 156.21,52.63 153.29,49.71 152.53,49.71 D1.1
DP
  Top 0.127: J2.A6 163.45,53.65 162.69,53.65 162.43,53.9 162.43,54.41 162.69,54.66 163.45,54.66 J2.B6 163.58,54.66 164.21,54.66 165.99,52.88 165.99,47.42 165.48,46.92 154.31,46.92 153.42,47.8 152.53,47.8 D1.3
EPD_3V3  (via drill 0.3)
  Top 0.127: v12.83,99.88 10.79,99.88 C7.1 | v50.67,78.54 57.53,71.68 58.17,71.68 EPD_3V3.TP 58.29,71.55 58.93,71.55 67.18,63.3 90.68,63.3 106.3,47.68 v106.3,37.77 94.87,26.34 88.77,26.34 87.25,27.87 | v85.22,15.93 82.93,15.93 82.3,15.29 82.3,14.78 82.42,14.66 82.42,14.4 J3.16 | 87.25,27.87 87.25,29.64 86.87,30.02 L1.2 | 87.25,27.87 v87.25,27.48 | v137.03,51.11 137.41,51.49 138.05,51.49 Q3.2
  Bottom 0.127: v12.83,99.88 29.34,99.88 v50.67,78.54 | v85.22,15.93 88.14,18.85 88.14,26.6 v87.25,27.48 | v137.03,51.11 128.91,51.11 115.57,37.77 v106.3,37.77
EPD_3V3_C  (via drill 0.3)
  Top 0.127: v50.93,96.19 50.17,96.19 20.32,66.35 20.32,65.58 U2.18 | v138.68,56.82 138.68,56.19 138.3,55.81 137.92,55.81 R_CL1.1 137.92,55.68 137.92,52.88 136.65,51.62 136.27,51.62 Q3.1 136.14,51.49 136.14,51.11 137.67,49.58 v137.67,46.03 | v133.1,29.01 133.1,4.62 EPD_3V3_C.TP
  Bottom 0.127: v50.93,96.19 62.48,96.19 101.85,56.82 v138.68,56.82 | v133.1,29.01 133.1,41.45 v137.67,46.03
EPD_BUSY  (via drill 0.3)
  Top 0.127: v85.22,15.29 85.47,15.29 85.85,14.91 85.85,14.4 J3.9 | v78.1,18.98 75.82,16.69 24.26,16.69 23.11,15.55 20.07,15.55 18.54,17.07 17.91,17.07 EPD_BUSY.TP 17.78,17.2 17.78,17.83 v17.27,18.34 | v10.16,64.31 10.16,65.46 U2.26
  Bottom 0.127: v85.22,15.29 84.71,15.8 84.71,16.05 86.87,18.21 86.87,19.1 86.23,19.74 78.87,19.74 v78.1,18.98 | v10.16,64.31 10.16,25.45 v17.27,18.34
EPD_CS  (via drill 0.3)
  Top 0.127: 22.61,16.94 22.61,39.93 20.32,42.22 20.32,47.93 U2.11 | v84.07,15.17 84.33,14.91 84.33,14.4 J3.12 | v77.09,19.48 75.95,20.63 75.95,21.01 D11.2 75.82,21.01 75.82,20.63 72.14,16.94 22.61,16.94 | v133.6,15.8 140.97,8.44 149.35,8.44 149.86,8.94 149.86,9.96 149.73,10.09 148.21,10.09 147.7,9.58 R9.1 | 22.61,16.94 EPD_CS.TP
  Bottom 0.127: v77.09,19.48 77.09,15.29 79.38,13.01 79.63,13.01 79.76,13.13 81.79,13.13 83.82,15.17 v84.07,15.17 84.45,14.78 87.63,14.78 88.65,15.8 v133.6,15.8
EPD_DC  (via drill 0.3)
  Top 0.127: v85.09,13.26 84.84,13.51 84.84,14.28 J3.11 | v120.27,5.51 120.78,5.01 121.41,5.01 EPD_DC.TP | v12.7,43.87 12.7,47.93 U2.5
  Bottom 0.127: v120.27,5.51 111,14.78 89.03,14.78 87.5,13.26 v85.09,13.26 84.58,13.26 83.95,12.63 80.39,12.63 80.01,12.24 78.99,12.24 76.33,14.91 61.47,14.91 58.42,17.96 34.16,17.96 12.7,39.42 v12.7,43.87
EPD_RST  (via drill 0.3)
  Top 0.127: v88.39,13.39 85.6,13.39 85.34,13.64 85.34,14.28 J3.10 | v111.76,13.39 117.6,13.39 126.24,4.75 127.13,4.75 EPD_RST.TP | v16.51,66.73 16.51,65.58 U2.21 | v22.35,43.11 48.01,17.45 v58.29,17.45
  Bottom 0.127: v111.76,13.39 v88.39,13.39 86.99,11.99 64.01,11.99 58.55,17.45 v58.29,17.45 | v16.51,66.73 16.51,48.95 v22.35,43.11
FLASH_CS  (via drill 0.3)
  Top 0.127: R5.1 146.3,9.58 146.18,9.58 145.67,10.09 144.27,10.09 142.75,11.61 v142.75,18.47 143.76,19.48 U6.1 | 39.5,31.04 39.5,35.61 38.99,36.12 38.61,36.12 D10.2 | 39.5,31.04 39.12,30.66 35.18,30.66 22.86,42.98 22.86,46.03 21.59,47.3 21.59,47.93 U2.12 | v54.1,23.67 46.86,23.67 39.5,31.04
  Bottom 0.127: v142.75,18.47 96.9,18.47 87.38,27.99 82.3,27.99 77.98,23.67 v54.1,23.67
GDR
  Top 0.127: 68.71,15.42 68.96,15.42 71.63,12.75 88.39,12.75 89.28,13.64 89.28,14.28 J3.2 | 68.71,15.42 68.71,15.04 64.9,11.23 63.88,11.23 63.75,11.36 63.75,12.75 63.88,12.88 63.88,15.93 Q2.1 | 68.71,15.42 R4.2
GND  (24 unrouted)
  Top 0.127: U2.29_5 13.21,55.3 12.19,55.3 U2.29_2
  pour Top: 74.72,10.06 74.74,10.08 92.88,10.08 92.9,10.06 92.92,10.04 92.94,10.02 92.94,0.13 92.99,0.08 170.13,0.08 170.18,0.13 170.18,67.12 92.24,67.12 92.22,67.14 92.1,67.26 92.08,67.28 92.08,111.12 73.24,111.12 73.24,108.88 73.22,108.86 73.2,108.84 73.18,108.82 21.04,108.82 21.02,108.84 21,108.86 20.98,108.88 20.98,111.12 0.04,111.12 0.04,0.18 74.58,0.18 74.58,9.92 74.6,9.94
  pour Bottom: 74.72,10.06 74.74,10.08 92.88,10.08 92.9,10.06 92.92,10.04 92.94,10.02 92.94,0.13 92.99,0.08 170.13,0.08 170.18,0.13 170.18,67.12 92.24,67.12 92.22,67.14 92.1,67.26 92.08,67.28 92.08,111.12 73.24,111.12 73.24,108.88 73.22,108.86 73.2,108.84 73.18,108.82 21.04,108.82 21.02,108.84 21,108.86 20.98,108.88 20.98,111.12 0.04,111.12 0.04,0.23 0.09,0.18 74.53,0.18 74.58,0.23 74.58,9.92 74.6,9.94
GPIO8
  Top 0.127: R10.2 19.18,42.6 19.18,47.8 19.05,47.93 U2.10
I2C_PW
  Top 0.127: C1.1 38.48,31.55 37.97,32.06 37.59,32.06 37.21,32.44 37.21,32.69 C2.1 37.08,32.82 35.69,32.82 R1_PINH.2 35.56,32.82 35.18,32.82 32.26,35.74 32.26,47.93 32.77,48.44 33.15,48.44 | 33.15,48.44 33.15,52.25 32.77,52.63 32.77,53.52 33.02,53.77 | 33.02,53.77 33.15,53.9 33.78,53.9 U3.6 | 32.77,55.04 33.15,55.43 33.78,55.43 U3.8 33.91,55.43 34.54,55.43 35.31,54.66 36.7,54.66 U3.2 | 32.77,55.04 32.77,54.03 33.02,53.77 | 32.77,55.04 31.37,55.04 21.59,64.82 21.59,65.46 U2.17 | 33.15,48.44 R2-PINH.2
INT_RTC  (via drill 0.3)
  Top 0.127: U5.3 87.12,58.35 87.12,60.51 R1-PINH1.1 86.99,60.51 59.06,60.51 47.75,71.81 47.62,71.81 47.24,72.19 46.74,72.19 INT_RTC.TP 46.61,72.19 45.97,72.19 45.47,71.68 v45.34,71.68 | v23.37,50.22 17.91,50.22 16.51,48.82 16.51,48.06 U2.8
  Bottom 0.127: v23.37,50.22 23.88,50.22 v45.34,71.68
IO/BOOT
  Top 0.127: C25.1 67.56,106.22 67.56,106.48 67.18,106.86 67.06,106.86 66.93,106.99 66.93,107.37 66.29,108 65.79,108 BOOT_BUTTON.3 65.66,108.13 62.36,108.13 BOOT_BUTTON.4 62.23,108 61.34,107.11 61.34,106.86 60.71,106.22 R_BOOT.1 60.58,106.1 60.33,105.84 60.33,104.95 24.13,68.76 24.13,65.58 U2.15
IO/CHANGE
  Top 0.127: C10.1 52.7,106.22 52.7,106.48 52.32,106.86 52.2,106.86 51.82,107.24 51.82,107.62 51.44,108 50.8,108 CHANGE_BUTTON.3 50.67,108.13 47.37,108.13 CHANGE_BUTTON.4 47.24,108.13 44.2,108.13 44.07,108 44.07,106.48 44.32,106.22 44.83,106.22 R_CHANGE.1 44.83,106.1 44.83,105.84 13.97,74.98 13.97,65.58 U2.23
MISO  (via drill 0.3)
  Top 0.127: R8.1 120.4,45.52 v120.4,44.76 120.4,42.73 143,20.12 144.27,20.12 144.53,19.87 144.53,19.23 144.15,18.85 144.02,18.85 143.89,18.72 143.89,18.34 143.76,18.21 U6.2 | 35.69,46.28 35.69,47.93 35.18,48.44 34.8,48.44 D6.2 | 35.69,46.28 35.43,46.03 v32.77,46.03 | v29.34,49.46 24.77,49.46 10.41,63.81 9.91,63.81 8.89,64.82 8.89,65.46 U2.27 8.89,65.58 9.14,65.84 v9.14,88.19 | v6.99,92.13 6.99,93.4 6.6,93.78 5.84,93.78 J1.P7 | v20.32,40.19 5.08,24.95 5.08,17.33 MISO.TP | 35.69,46.28 v35.81,46.15
  Bottom 0.127: v29.34,49.46 29.59,49.2 | 29.59,49.2 v32.77,46.03 | v6.99,92.13 9.14,89.97 v9.14,88.19 | v20.32,40.19 20.57,40.19 29.59,49.2 | v120.4,44.76 37.21,44.76 v35.81,46.15
MOSI  (via drill 0.3)
  Top 0.127: R7.1 8.51,99.88 8.51,99.24 4.45,95.18 4.45,93.27 4.32,93.14 4.32,90.22 5.08,89.46 5.71,89.46 J1.P3 5.84,89.33 6.86,89.33 v7.87,88.32 | MOSI.TP 9.14,17.33 9.14,18.47 20.83,30.15 v20.83,32.06 20.83,41.33 20.19,41.96 18.54,41.96 15.24,45.27 15.24,47.93 U2.7 15.11,48.06 15.11,48.82 v14.73,49.2 | v69.47,15.67 72.14,13.01 82.68,13.01 v83.06,13.39 83.31,13.64 83.31,14.28 J3.14 | v36.07,37.01 35.81,37.01 35.43,36.63 35.43,36.25 D8.2 | v150.62,15.17 151.13,15.17 151.38,15.42 151.38,15.67 U6.5
  Bottom 0.127: v7.87,88.32 7.87,87.81 14.73,80.95 v14.73,49.2 | v69.47,15.67 61.47,15.67 40.13,37.01 v36.07,37.01 36.07,33.2 34.92,32.06 v20.83,32.06 | v150.62,15.17 150.11,15.17 149.99,15.29 88.52,15.29 87.25,14.02 83.69,14.02 v83.06,13.39
N$1  (via drill 0.3)
  Top 0.127: v159.77,51.11 163.32,51.11 J2.A4 | v128.78,44.63 128.14,44 126.62,44 PFMF.050.1.1
  Bottom 0.127: v159.77,51.11 156.84,51.11 152.27,46.54 130.68,46.54 v128.78,44.63
N$2  (via drill 0.3)
  Top 0.127: v157.23,46.41 155.19,44.38 154.94,44.38 R2-USB1.2 | v162.43,52.5 162.56,52.5 162.69,52.63 163.45,52.63 J2.A5
  Bottom 0.127: v157.23,46.41 157.23,47.3 v162.43,52.5
N$3
  Top 0.127: R2-USB.1 153.54,45.52 153.29,45.52 152.78,45.01 152.78,43.61 153.03,43.36 162.31,43.36 166.24,47.3 166.24,53.65 164.21,55.68 163.58,55.68 J2.B5
N$4  (via drill 0.3)
  Top 0.127: C1_BAT1.1 75.06,24.56 75.06,24.31 75.44,23.93 76.07,23.93 76.2,24.06 Q1.2 76.33,24.18 v77.85,24.18 | 130.18,45.65 129.92,45.9 129.92,46.66 130.43,47.17 130.94,47.17 IC1.1 | 130.18,45.65 130.43,45.39 130.94,45.39 IC1.3 131.06,45.39 131.44,45.39 132.21,44.63 134.37,44.63 134.62,44.88 136.53,44.88 D2.1 | v130.05,44.63 130.05,45.52 130.18,45.65
  Bottom 0.127: v77.85,24.18 78.1,24.18 90.93,37.01 122.43,37.01 v130.05,44.63
N$5  (via drill 0.3)
  Top 0.127: v76.58,15.93 78.1,14.4 78.23,14.4 J3.24 | v87.63,18.98 87.88,18.98 88.27,19.36 88.27,19.61 EPD_C12.1
  Bottom 0.127: v76.58,15.93 76.58,20.37 77.34,21.13 85.47,21.13 v87.63,18.98
N$6  (via drill 0.3)
  Top 0.127: v79.12,15.93 78.87,15.67 78.87,14.4 J3.23 | v84.96,18.98 85.34,19.36 85.34,19.61 EPD_C11.1
  Bottom 0.127: v79.12,15.93 79.12,17.96 80.64,19.48 84.45,19.48 v84.96,18.98
N$7
  Top 0.127: 94.74,27.87 94.36,27.48 94.36,27.23 D4.2 | 94.74,27.87 96.9,30.02 96.9,30.53 C4.1 | 94.74,27.87 91.69,30.91 90.93,30.91 D3.1
N$8  (via drill 0.3)
  Top 0.127: v124.21,47.04 124.21,41.71 R2_BAT.2 | v129.54,53.65 130.3,54.41 U1.5
  Bottom 0.127: v124.21,47.04 124.21,48.31 v129.54,53.65
N$9  (via drill 0.3)
  Top 0.127: v79.5,13.51 79.38,13.64 79.38,14.28 J3.22 | v86.36,18.98 86.74,19.36 86.74,19.61 EPD_C10.1
  Bottom 0.127: v79.5,13.51 79.76,13.51 80.77,14.53 82.8,14.53 86.36,18.09 v86.36,18.98
N$10  (via drill 0.3)
  Top 0.127: v79.88,15.17 79.88,14.4 J3.21 | v83.57,18.98 83.95,19.36 83.95,19.61 EPD_C9.1
  Bottom 0.127: v79.88,15.17 81.53,15.17 83.57,17.2 v83.57,18.98
N$11
  Top 0.127: CHG_LED.C 126.49,56.44 125.22,56.44 124.46,57.2 122.94,57.2 122.55,56.82 122.55,56.44 R1_BAT.1
N$12  (via drill 0.3)
  Top 0.127: v125.6,55.3 124.46,56.44 123.95,56.44 R1_BAT.2 | v131.83,54.66 132.21,54.28 132.59,54.28 132.72,54.41 U1.1
  Bottom 0.127: v125.6,55.3 131.19,55.3 v131.83,54.66
N$13  (via drill 0.3)
  Top 0.127: v80.14,15.93 80.39,15.67 80.39,14.4 J3.20 | v80.52,16.94 81.03,16.94 82.17,18.09 82.17,19.36 82.42,19.61 EPD_C8.1
  Bottom 0.127: v80.14,15.93 80.14,16.56 v80.52,16.94
N$14  (via drill 0.3)
  Top 0.127: v80.77,15.93 80.77,14.4 J3.19 | v80.77,18.98 81.15,19.36 81.15,19.61 EPD_C7.1
  Bottom 0.127: v80.77,15.93 80.77,16.56 81.03,16.82 81.03,17.45 80.77,17.71 v80.77,18.98
N$15  (via drill 0.3)
  Top 0.127: v81.66,15.93 81.66,15.04 81.28,14.66 81.28,14.4 J3.18 | v81.28,17.83 79.76,19.36 79.76,19.61 EPD_C6.1
  Bottom 0.127: v81.66,15.93 81.66,17.45 v81.28,17.83
N$16
  Top 0.127: C_DELAY.1 55.12,101.14 54.48,101.14 52.7,102.92 52.32,102.92 IC2.5
N$17  (via drill 0.3)
  Top 0.127: v82.8,15.17 82.8,14.4 J3.15 | v77.47,20.63 77.85,21.01 78.36,21.01 EPD_C5.2
  Bottom 0.127: v82.8,15.17 81.91,15.17 81.53,14.78 80.14,14.78 80.01,14.66 79.76,14.66 77.6,16.82 77.6,20.5 v77.47,20.63
N$18  (via drill 0.3)
  Top 0.127: v86.74,15.93 87.63,15.04 87.76,15.04 87.88,14.91 87.88,14.4 J3.5 | v86.87,16.94 86.36,16.94 84.45,18.85 84.45,19.1 84.71,19.36 84.71,20.25 84.84,20.37 84.84,20.5 84.58,20.75 84.58,21.26 84.84,21.52 84.84,21.64 84.45,22.02 73.28,22.02 69.34,18.09 67.82,18.09 67.44,18.47 67.44,18.72 EPD_C2.1
  Bottom 0.127: v86.74,15.93 86.74,16.82 v86.87,16.94
N$19  (via drill 0.3)
  Top 0.127: v87.76,15.55 88.39,14.91 88.39,14.4 J3.4 | v88.65,21.77 87.5,21.77 86.99,22.28 72.77,22.28 69.22,18.72 68.83,18.72 EPD_C1.1
  Bottom 0.127: v87.76,15.55 87.76,18.09 88.65,18.98 v88.65,21.77
N$21
  Top 0.127: R_CAPACITOR.1 92.96,48.44 93.73,48.44 94.61,47.55 96.39,47.55 96.77,47.93 96.77,56.82 91.57,62.03 89.03,62.03 88.9,62.16 D7.1
RESE
  Top 0.127: J3.3 88.77,14.4 88.77,15.17 87.5,16.44 65.66,16.44 65.53,16.31 65.15,16.31 65.02,16.18 65.02,16.05 Q2.2 65.02,15.93 65.02,15.17 64.39,14.53 64.39,12.12 R3.2
RESE'
  Top 0.127: 64.26,10.34 64.26,9.83 SJ1.2 64.26,10.34 | 64.26,10.34 64.26,10.47 63.75,10.97 63.63,10.97 63.12,11.48 63.12,11.99 R3.1 | 64.26,10.34 65.15,10.34 65.66,10.85 66.55,10.85 R2.2
RESET  (via drill 0.3)
  Top 0.127: v46.23,105.46 48.77,102.92 49.4,102.92 IC2.1 | v28.83,105.72 28.45,106.1 28.07,106.1 C5.1 27.94,106.22 27.43,106.22 26.92,106.73 26.92,107.37 26.42,107.88 25.78,107.88 RESET_BUTTON.3 25.65,108 22.35,108 RESET_BUTTON.4 22.23,107.88 21.59,107.88 21.21,107.49 21.21,107.24 21.34,107.11 21.34,106.99 21.21,106.86 21.08,106.86 20.83,106.61 20.83,106.48 20.57,106.22 R14.1 20.45,106.1 20.32,105.97 20.32,100.13 6.6,86.41 6.6,64.7 10.16,61.14 10.16,48.06 U2.3
  Bottom 0.127: v46.23,105.46 29.08,105.46 v28.83,105.72
RTC_RST
  Top 0.127: U2.16 22.86,65.46 22.86,64.82 23.24,64.44 31.88,64.44 41.02,73.59 42.8,73.59 56.64,59.74 84.84,59.74 85.72,58.85 85.72,58.35 U5.4
RX  (via drill 0.3)
  Top 0.127: v16.38,78.03 12.7,74.35 12.7,65.58 U2.24 | v48.89,78.03 75.56,104.7 82.8,104.7 84.07,103.43 84.71,103.43 RX.TP
  Bottom 0.127: v48.89,78.03 v16.38,78.03
SCK  (via drill 0.3)
  Top 0.127: v144.15,9.58 144.27,9.45 144.91,9.45 R6.1 | v149.86,14.78 149.86,15.04 150.62,15.8 150.62,16.05 151,16.44 151.13,16.44 151.26,16.56 151.26,16.94 151.38,17.07 U6.6 | v83.69,13.39 83.82,13.51 83.82,14.28 J3.13 | v37.72,35.49 37.72,35.74 37.34,36.12 36.96,36.12 D9.2 36.83,36.25 36.83,36.88 34.67,39.04 v34.29,39.04 | v13.97,45.27 13.97,47.93 U2.6 | v6.99,91.49 6.86,91.62 5.84,91.62 J1.P5 | v21.34,38.91 21.34,25.45 13.72,17.83 13.72,17.2 SCK.TP
  Bottom 0.127: v149.86,14.78 144.65,9.58 v144.15,9.58 116.59,9.58 111.12,15.04 88.65,15.04 87.38,13.77 84.07,13.77 v83.69,13.39 83.19,12.88 79.88,12.88 79.76,12.75 78.87,12.75 76.45,15.17 61.59,15.17 41.27,35.49 v37.72,35.49 | v34.29,39.04 21.34,39.04 | 21.34,39.04 20.45,39.04 14.22,45.27 v13.97,45.27 10.41,48.82 10.41,49.33 10.67,49.58 10.67,64.44 6.86,68.25 6.86,88.06 6.99,88.19 v6.99,91.49 | 21.34,39.04 v21.34,38.91
SCL  (via drill 0.3)
  Top 0.127: 33.91,49.96 33.91,50.09 36.83,53.01 U3.4 | 33.91,49.96 33.91,48.95 34.04,48.82 34.04,48.69 33.91,48.57 33.91,47.68 33.27,47.04 R2-PINH.1 | v32.64,49.96 17.78,64.82 17.78,65.46 U2.20 | 33.91,49.96 v33.78,49.96 | 139.83,54.16 139.83,45.77 165.1,20.5 J4.4 | 139.83,54.16 139.83,56.57 139.95,56.7 140.46,56.7 U4.7 | v89.79,50.47 89.66,50.34 89.66,49.08 U5.16 | 139.83,54.16 v139.7,54.16
  Bottom 0.127: v33.78,49.96 v32.64,49.96 32.64,51.23 31.88,52 31.88,52.25 33.66,54.03 84.45,54.03 88.14,50.34 89.66,50.34 v89.79,50.47 125.73,50.47 129.41,54.16 v139.7,54.16
SDA  (via drill 0.3)
  Top 0.127: v140.59,45.65 v140.59,55.55 140.59,56.06 U4.8 | v164.08,19.74 164.47,19.36 165.1,19.36 J4.3 | v34.8,32.57 34.8,31.8 35.05,31.55 35.56,31.55 R1_PINH.1 | v35.81,53.52 36.2,53.9 36.7,53.9 U3.3 | v32.51,52.25 31.62,52.25 19.05,64.82 19.05,65.46 U2.19 | v87.5,50.34 88.01,49.84 | 88.01,49.84 88.27,49.58 88.27,49.08 U5.15 88.01,49.84 | 88.01,49.84 v89.03,50.85
  Bottom 0.127: v140.59,45.65 140.59,43.23 v164.08,19.74 | 34.8,52.25 34.8,52.5 v35.81,53.52 38.99,50.34 v87.5,50.34 | 34.8,52.25 v34.8,32.57 | 34.8,52.25 v32.51,52.25 | v140.59,55.55 125.98,55.55 125.73,55.81 93.98,55.81 v89.03,50.85
SRC
  Top 0.127: C4.2 96.77,31.93 90.55,31.93 86.87,35.61 86.36,35.61 D5.2 86.23,35.49 86.23,34.6 82.3,30.66 82.3,30.02 | 82.3,30.02 82.17,30.02 81.66,29.52 77.34,29.52 74.3,26.47 74.3,24.06 74.17,23.93 69.6,23.93 64.52,18.85 64.52,18.09 Q2.3 | 82.3,30.02 L1.1
SS_SD  (via drill 0.3)
  Top 0.127: v11.05,49.33 11.3,49.08 11.3,48.06 U2.4 | v7.37,87.94 6.99,88.32 6.35,88.32 J1.P2 | 119.51,43.23 133.6,29.14 133.6,19.48 144.4,8.69 148.59,8.69 148.97,9.07 148.97,9.45 R22.1 | 119.51,43.23 119.51,46.03 119.63,46.15 121.16,46.15 121.79,46.79 122.05,46.79 D12.2 | v34.29,39.68 41.53,39.68 64.01,17.2 64.9,17.2 66.42,18.72 66.42,20.25 69.6,23.42 99.69,23.42 119.51,43.23
  Bottom 0.127: v7.37,87.94 11.05,84.25 v11.05,49.33 11.05,48.82 20.19,39.68 v34.29,39.68
TX  (via drill 0.3)
  Top 0.127: v17.53,64.44 11.81,64.44 11.43,64.82 11.43,65.46 U2.25 | v49.53,78.03 74.8,103.3 79.88,103.3 TX.TP
  Bottom 0.127: v17.53,64.44 35.94,64.44 v49.53,78.03
USB_D+  (via drill 0.3)
  Top 0.127: v153.42,48.31 153.92,47.8 154.94,47.8 D1.4 | v37.59,56.06 36.58,57.08 v35.31,57.08 | v25.02,48.44 24.51,48.44 24.13,48.06 U2.14
  Bottom 0.127: v153.42,48.31 148.46,48.31 140.72,56.06 v37.59,56.06 | v35.31,57.08 34.8,56.57 34.8,56.44 26.8,48.44 v25.02,48.44
USB_D-  (via drill 0.3)
  Top 0.127: v153.92,49.33 154.18,49.58 154.94,49.58 D1.6 | v30.86,56.57 v36.45,56.57 | v23.37,49.2 22.86,48.69 22.86,48.06 U2.13
  Bottom 0.127: v153.92,49.33 147.83,49.33 140.84,56.31 37.97,56.31 37.72,56.57 v36.45,56.57 | v30.86,56.57 30.73,56.57 v23.37,49.2
VBAT
  Top 0.127: U4.2 142.62,56.7 142.62,57.08 U4.3 142.62,57.2 143.26,57.2 143.38,57.33 143.38,57.97 143,58.35 135.51,58.35 133.6,56.44 132.84,56.44 U1.3 132.72,56.44 131.57,56.44 130.81,57.2 127.51,57.2 127.25,56.95 127.25,55.81 126.87,55.43 126.62,55.43 126.24,55.04 126.24,54.66 C2_BAT.1 126.11,54.54 125.86,54.54 114.94,43.61 | 114.94,43.61 95,23.67 79.38,23.67 78.36,24.69 78.36,25.07 Q1.3 | 114.94,43.61 88.77,69.78 88.77,103.05 VBAT.TP
VBUS  (via drill 0.3)
  Top 0.127: C5_USB.1 156.72,50.47 154.43,50.47 153.42,49.46 153.42,48.95 153.03,48.57 152.53,48.57 D1.2 152.4,48.57 150.11,48.57 C4_USB.1 149.99,48.57 v141.1,48.57 | 128.91,56.44 130.18,56.44 U1.4 | 128.91,56.44 128.14,56.44 CHG_LED.A | 129.79,51.23 129.79,50.98 127.25,48.44 126.62,48.44 PFMF.050.1.2 126.49,48.44 123.95,48.44 v123.7,48.19 | 129.79,51.23 129.79,51.36 | 129.79,51.23 130.94,51.23 135.13,47.04 136.53,47.04 D2.2 136.65,47.04 136.78,47.17 v136.78,47.8 | 129.79,51.23 C1_BAT.1 129.79,51.36 | 128.91,56.44 128.91,51.87 129.41,51.36 129.79,51.36 | R1_PWRUSB.2 81.66,24.69 81.66,25.07 80.64,26.09 76.33,26.09 Q1.1 76.2,26.09 76.2,26.47 v75.82,26.85 | v73.28,29.39 41.53,61.14 41.53,72.06 VBUS.TP
  Bottom 0.127: v141.1,48.57 137.54,48.57 v136.78,47.8 | v73.28,29.39 v75.82,26.85 87.25,38.28 114.55,38.28 123.7,47.42 v123.7,48.19
VRTC  (via drill 0.3)
  Top 0.127: C9.1 95.5,48.69 95,48.69 93.85,49.84 92.96,49.84 R_CAPACITOR.2 92.84,49.84 v90.8,49.84 | 87.63,47.3 87.63,46.03 C8.1 | 87.63,47.3 86.99,47.93 86.99,48.95 U5.14 | 87.63,47.3 v87.76,47.42
  Bottom 0.127: v90.8,49.84 90.17,49.84 v87.76,47.42
VUSB
  Top 0.127: 163.45,56.19 162.69,56.19 161.92,55.43 161.92,52.38 162.69,51.62 163.45,51.62 J2.B9 | 163.45,56.19 163.45,56.44 J2.A9 | 163.45,56.19 J2.B4